# Allegro board GPS_INTERFACE_BOARDv1.brd
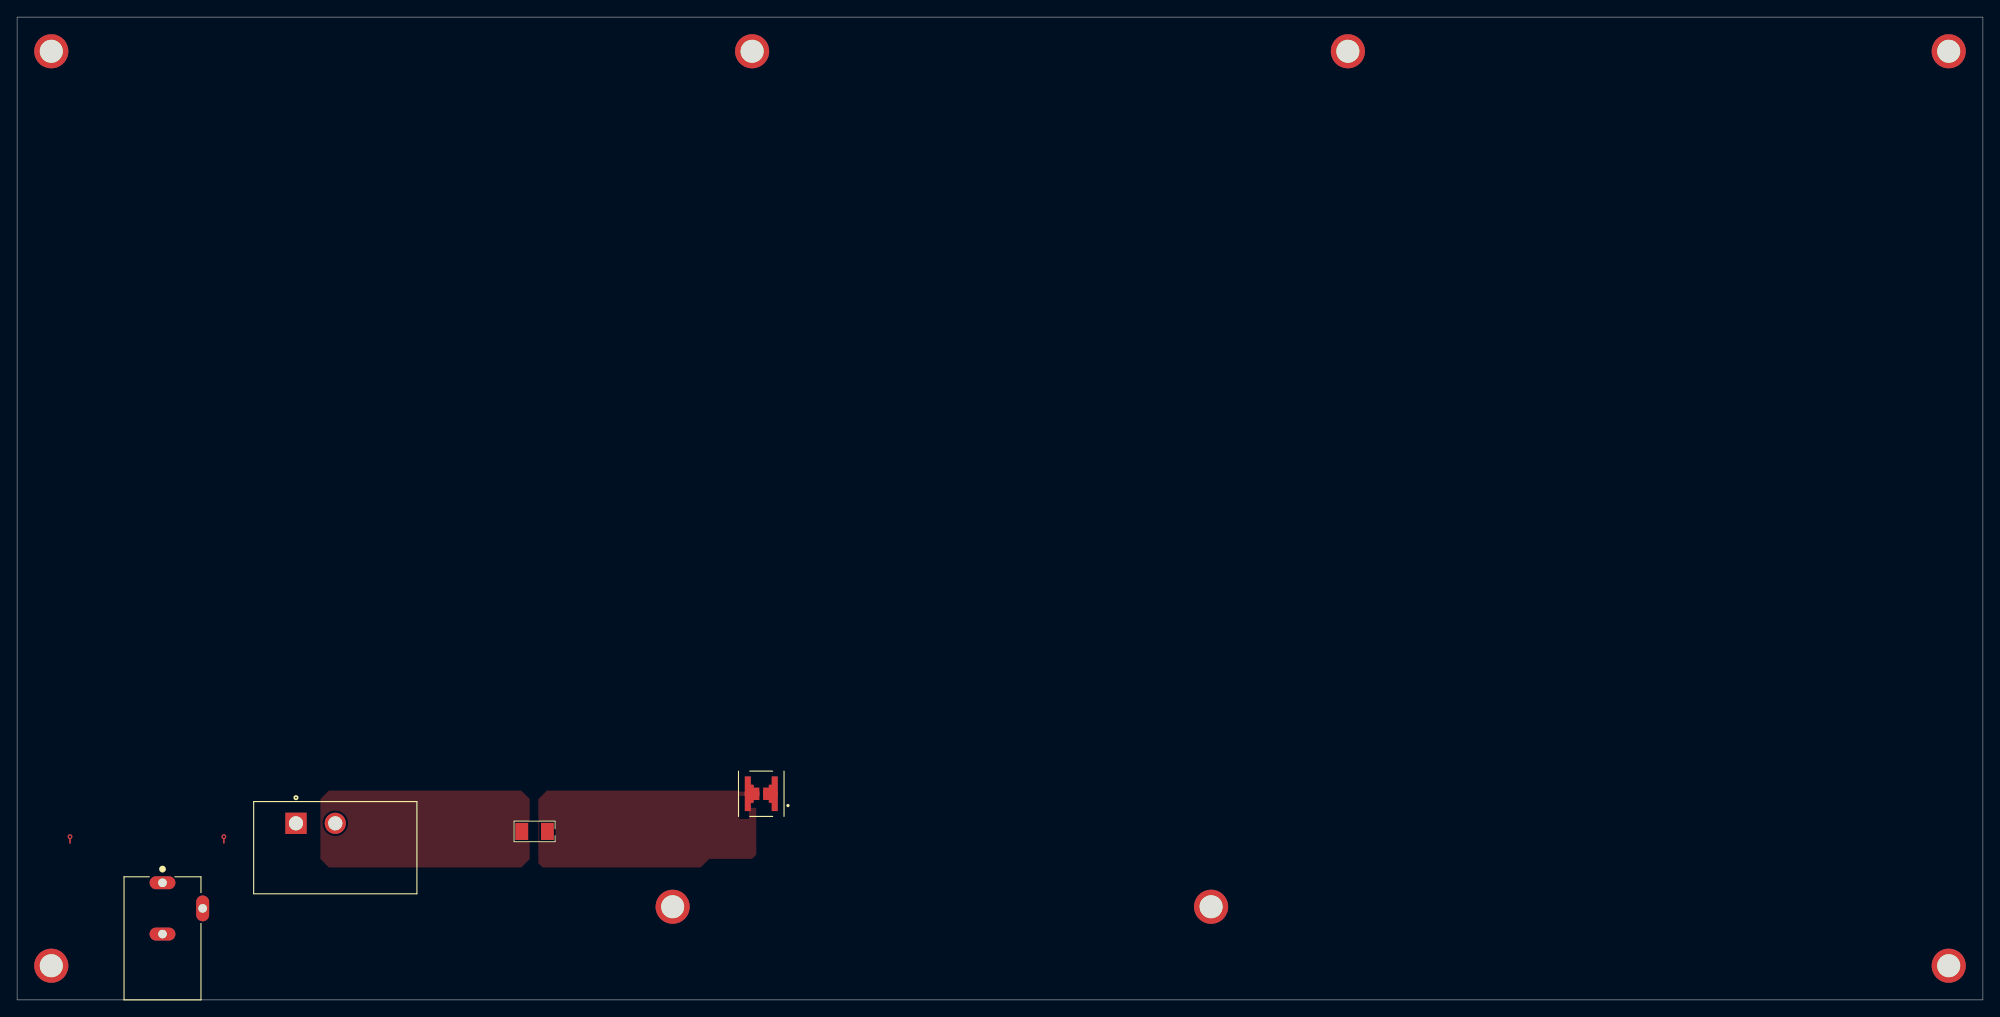
[diagram p0: board, top side]
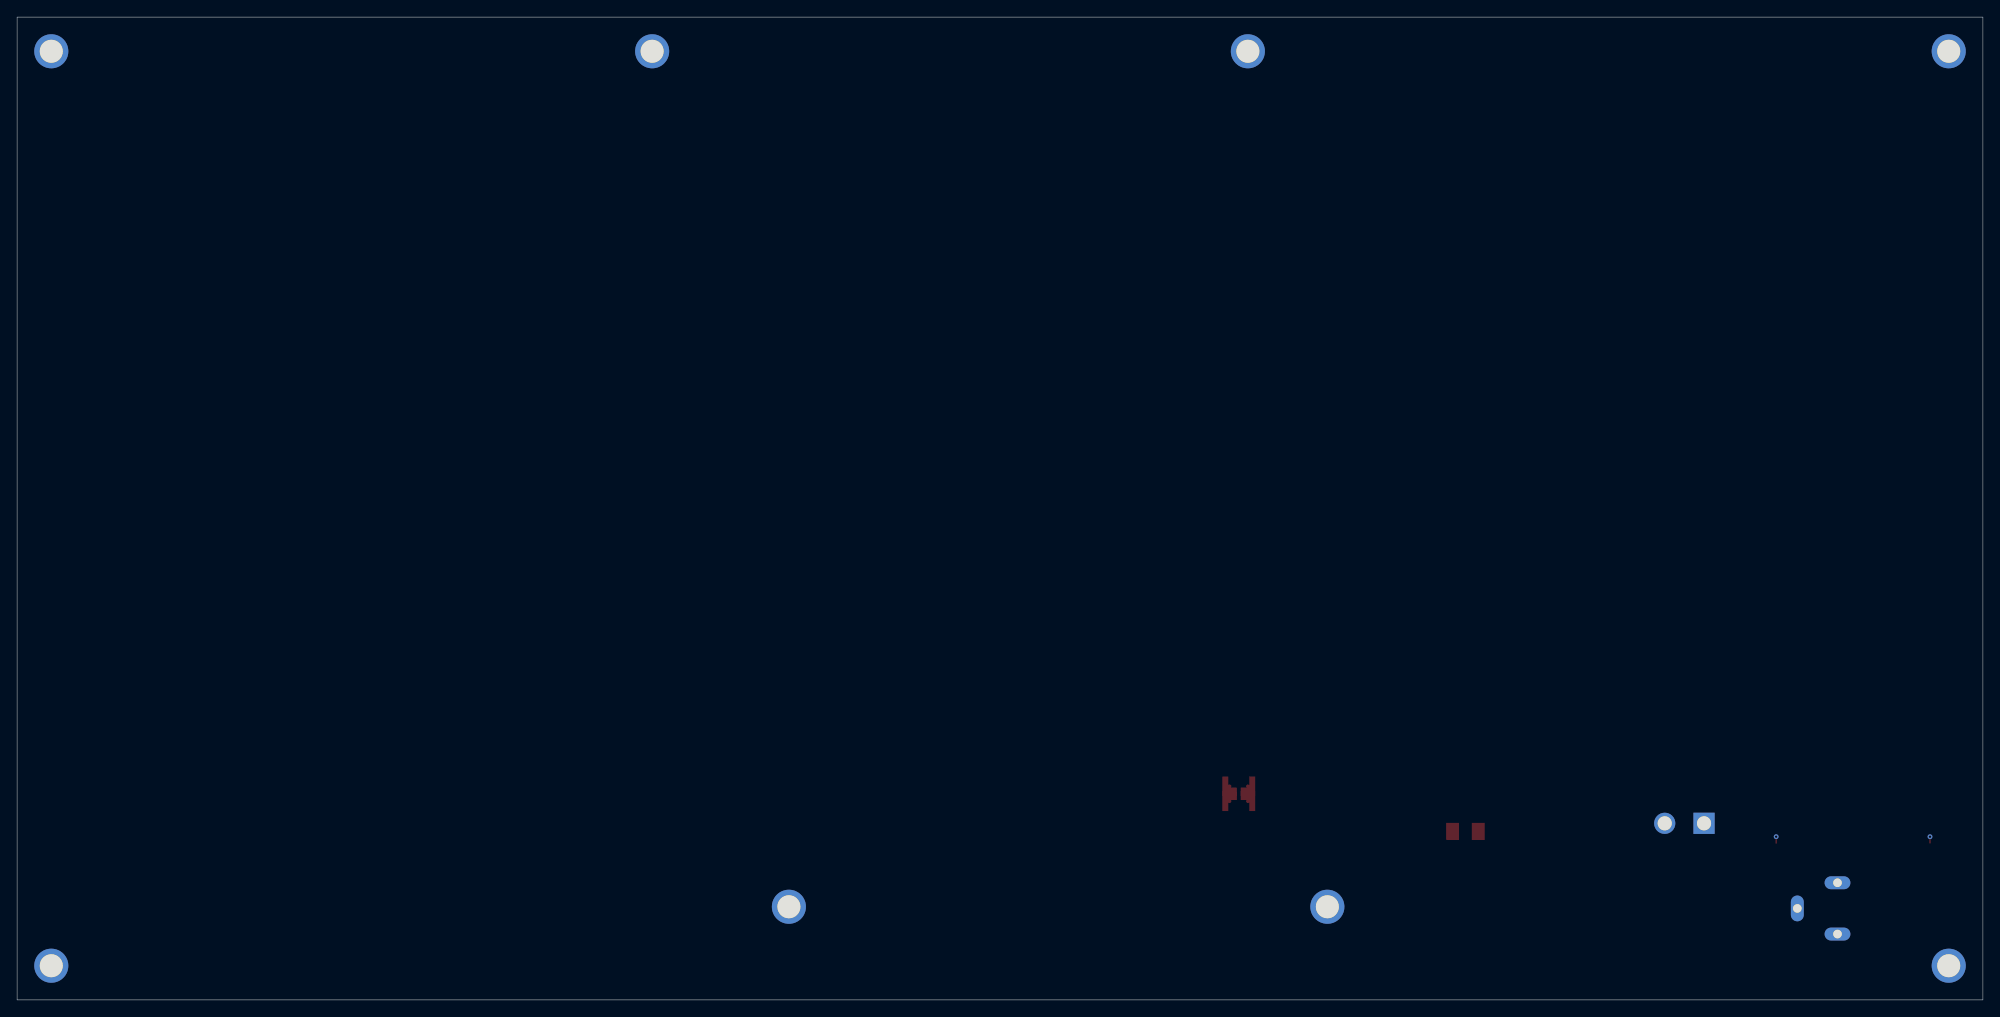
[diagram p1: board, bottom side, seen from below]

Outline 230 x 115 mm; copper layers: TOP, L2, L3, L4, L5, BOTTOM. Coordinates in mm from the lower left corner of the outline.
Outline path: 0,115 230,115 230,0 0,0 0,115

## Design rules (mm)
constraint set DEFAULT: min track width 0.17, pair gap 0.3
net group GPS_GROUP[0..4]: nets GPS_GROUP.GPS_CLK_N GPS_GROUP.GPS_CLK_P
net group CLK_TO_SFP[0..11]: nets CLK_TO_SFP.CLK_TO_SFP_N0 CLK_TO_SFP.CLK_TO_SFP_N1 CLK_TO_SFP.CLK_TO_SFP_N2 CLK_TO_SFP.CLK_TO_SFP_N3 CLK_TO_SFP.CLK_TO_SFP_N4 CLK_TO_SFP.CLK_TO_SFP_N5 CLK_TO_SFP.CLK_TO_SFP_P0 CLK_TO_SFP.CLK_TO_SFP_P1 CLK_TO_SFP.CLK_TO_SFP_P2 CLK_TO_SFP.CLK_TO_SFP_P3 CLK_TO_SFP.CLK_TO_SFP_P4 CLK_TO_SFP.CLK_TO_SFP_P5
net group FMC[0..60]: nets FMC.CLK_FILTER_A FMC.CLK_FILTER_B FMC.CLK_GEN_INTR* FMC.CLK_GEN_LOL FMC.CLK_GEN_LOL_N FMC.CLK_GEN_RST* FMC.CLK_TO_FPGA_N FMC.CLK_TO_FPGA_P FMC.DATA_TO_FF_N0 FMC.DATA_TO_FF_N1 FMC.DATA_TO_FF_N2 FMC.DATA_TO_FF_N3 FMC.DATA_TO_FF_N4 FMC.DATA_TO_FF_N5 FMC.DATA_TO_FF_P0 FMC.DATA_TO_FF_P1 FMC.DATA_TO_FF_P2 FMC.DATA_TO_FF_P3 FMC.DATA_TO_FF_P4 FMC.DATA_TO_FF_P5 FMC.GPS_CLK_EN* FMC.GPS_IRIGB FMC.GPS_PPS_N FMC.GPS_PPS_P FMC.I2C_BUS_INT0* FMC.I2C_BUS_INT1* FMC.I2C_BUS_RST* FMC.OSC_EN FMC.PWR_GOOD FMC.RECOV_CLK_N0 FMC.RECOV_CLK_N1 FMC.RECOV_CLK_N2 FMC.RECOV_CLK_N3 FMC.RECOV_CLK_N4 FMC.RECOV_CLK_N5 FMC.RECOV_CLK_P0 FMC.RECOV_CLK_P1 FMC.RECOV_CLK_P2 FMC.RECOV_CLK_P3 FMC.RECOV_CLK_P4 FMC.RECOV_CLK_P5 FMC.RECOV_DATA_N0 FMC.RECOV_DATA_N1 FMC.RECOV_DATA_N2 FMC.RECOV_DATA_N3 FMC.RECOV_DATA_N4 FMC.RECOV_DATA_N5 FMC.RECOV_DATA_P0 FMC.RECOV_DATA_P1 FMC.RECOV_DATA_P2 FMC.RECOV_DATA_P3 FMC.RECOV_DATA_P4 FMC.RECOV_DATA_P5 FMC.SCL FMC.SDA FMC.SFP_TX_DISABLE0 FMC.SFP_TX_DISABLE1 FMC.SFP_TX_DISABLE2 FMC.SFP_TX_DISABLE3 FMC.SFP_TX_DISABLE4 FMC.SFP_TX_DISABLE5
net group VM1: nets GND_SIGNAL

## Placement (name value [footprint] x y rotation side)
F1  4A  [CAP1206]  60.55 19.71 0 top
FL1  120 Ohm@100MHz  [FIL_DLW5BTM501SQ2L]  87.07 24.12 270 top
J5  PJ-102AH  [CUI_PJ-102AH]  17.01 7.21 270 top
NOREF  -  [unnamed]  4 4 0 top
NOREF#2  -  [unnamed]  139.7 10.9 0 top
NOREF#3  -  [unnamed]  86 111 0 top
NOREF#4  -  [unnamed]  76.7 10.9 0 top
NOREF#5  -  [unnamed]  226 4 0 top
NOREF#6  -  [unnamed]  4 111 0 top
NOREF#7  -  [unnamed]  226 111 0 top
NOREF#8  -  [unnamed]  155.7 111 0 top
S1  L101011MS02Q  [SW_L101011MS02Q]  37.23 17.81 0 top

## Library data of the parts
F1 = FUSE: Tolerance: TOL?; User Part Number: PN?
FL1 = 490-11112-1-ND
J5 = PJ-102AH
S1 = L101011MS02Q

## Footprints (pads in the part's own frame, mm; a bottom-side part is the same pattern mirrored in y, then rotated)
CAP1206
  rect 1.5x2 smd: 1(-1.5,0) 2(1.5,0)
CUI_PJ-102AH
  oval 1.508x3.016 hole 1: 1(-6.5,0) 2(-0.5,0)
  oval 3.016x1.508 hole 1: 3(-3.5,4.7)
FIL_DLW5BTM501SQ2L
  custom 2.3x1.7 smd: 1(0.875,1.075) 2(-0.875,1.075) 3(-0.875,-1.075) 4(0.875,-1.075)
SW_L101011MS02Q
  rect 2.48x2.48 hole 1.65: 1(-4.6,2.85)
  round 2.48 hole 1.65: 2(0,2.85)
unnamed
  round 3.988 hole 2.692: 1(0,0)

## Nets
GND_IN: FL1.4 J5.2 J5.3
GND_POWER: FL1.3
N136297: J5.1 S1.1
N136342: FL1.2
N136436: F1.2 FL1.1
N195870: F1.1 S1.2

Pads without a net: NOREF 1; NOREF#2 1; NOREF#3 1; NOREF#4 1; NOREF#5 1; NOREF#6 1; NOREF#7 1; NOREF#8 1

## Via types
v1: diameter 0.56, hole 0.3, TOP to BOTTOM, 2 vias

## Routing (per net, layer and track width the routed paths; a pad name or vN(x,y) marks a point on that pad's centre or on a via; arc(x,y) is an arc through that point)
GND_IN: length 10.5
  L3 w0.17: 21.71,9.02 J5.3 ; J5.3 20.78,10.71 ; J5.3 22.65,10.71 ; J5.3 21.71,12.39 ; 17.01,6.77 J5.2 ; J5.2 17.01,8.64 ; J5.2 15.33,7.71 ; J5.2 18.7,7.71
GND_POWER: length 1.5
  TOP w0.17: 24.19,18.36 v1(24.19,19.1) ; 6.19,18.36 v1(6.19,19.1)

## Copper pours and planes (outline as drawn; the poured copper is in the pictures)
GND_IN on L3: 87.98,23.49 97.48,23.49 97.97,22.99 97.97,1.5 97.48,1 70.98,1 69.98,2 11,2 10,3 10,10.5 10.5,11 18.5,11 22.49,15 35.99,15 36.49,14.5 36.99,15 71.48,15 72.48,14 72.48,7.5 79.48,7.5 79.98,8 79.98,14 81.98,16 86.98,16 87.48,16.5 87.48,22.99
GND_POWER on L2, L5: 2,2 228,2 228,113 2,113 ; 1 cut-out
VCC3V3 on L3: 28.89,56.88 27.9,56.22 26.72,55.99 24.49,55.99 22.99,57.49 22.99,66.98 24.49,68.48 87.98,68.48 90.98,71.48 90.98,106.47 91.98,107.47 226.44,107.47 227.94,105.97 227.94,47.49 220.94,40.49 220.94,16.5 101.97,16.5 99.97,18.5 99.97,55.99 97.97,57.99 97.48,57.99 97.48,56.49 38.26,56.49 37.36,56.86 36.99,57.76 36.99,56.49 36.49,56.49 36.49,56.99 35.99,56.99 35.99,56.49 35.49,56.49 35.49,57.99 34.99,57.99 34.99,57.76 34.62,56.86 33.72,56.49 31.26,56.49 31.26,57.99 30.09,57.75 29.09,57.09
Net_2 on TOP: 60.98,16 60.98,23.49 61.98,24.49 85.48,24.49 86.48,23.49 86.48,17 85.98,16.5 80.98,16.5 79.98,15.5 61.48,15.5
Net_3 on TOP: 36.49,24.49 58.98,24.49 59.98,23.49 59.98,16.5 58.98,15.5 36.49,15.5 35.49,16.5 35.49,23.49
Net_6 on L3: 18,11.5 2.5,11.5 2,12 2,23.49 3,24.49 33.49,24.49 33.99,23.99 33.99,16 33.49,15.5 21.99,15.5
Net_10 on L3: 19.5,54.99 4.5,54.99 2.5,56.99 2.5,83.48 6.5,87.48 86.98,87.48 88.48,85.98 88.48,71.98 85.98,69.48 22.99,69.48 20.99,67.48 20.99,56.49
Net_11 on L3: 24.49,37.49 75.98,37.49 76.48,37.99 76.48,53.49 75.48,54.49 24.49,54.49 22.99,52.99 22.99,38.99
Net_12 on L3: 76.98,35.49 76.98,26.49 75.98,25.49 4,25.49 3,26.49 3,52.49 4.5,53.99 19.99,53.99 21.49,52.49 21.49,37.99 22.99,36.49 75.98,36.49
Net_15 on L3: 78.48,54.49 78.48,28.49 89.48,28.49 89.98,27.99 89.98,24.49 94.98,24.49 96.48,25.99 96.48,54.49 95.98,54.99 78.98,54.99

## Text on the board
User.Comments: Leave 2 mm from edge
DIMENSION: 115.0000 | 111.0000 | 11.9500 | 10.9000 | 8.9000 | 4.0000 | 76.7000 | 81.0000 | 82.0000 | 135.4000 | 139.7000 | 226.0000 | 230.0000 | 69.7000 | 70.3000
